# EAGLE board sumorobot (EAGLE 7.1.0)
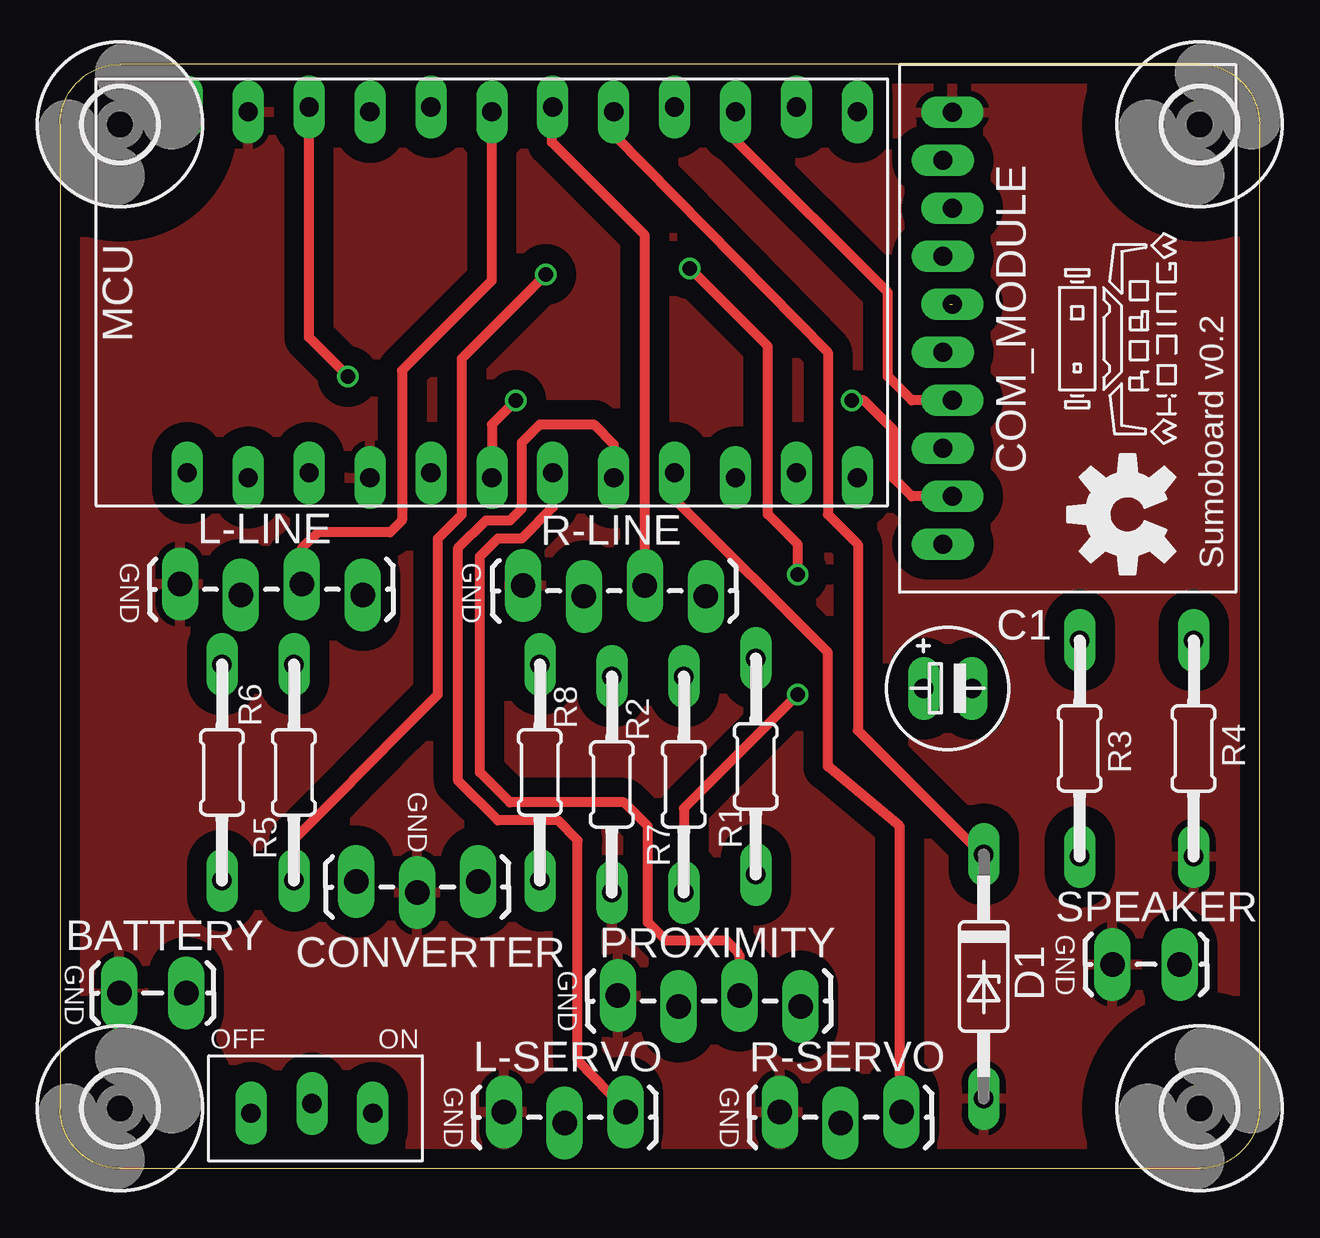
[diagram p0: board, top side]
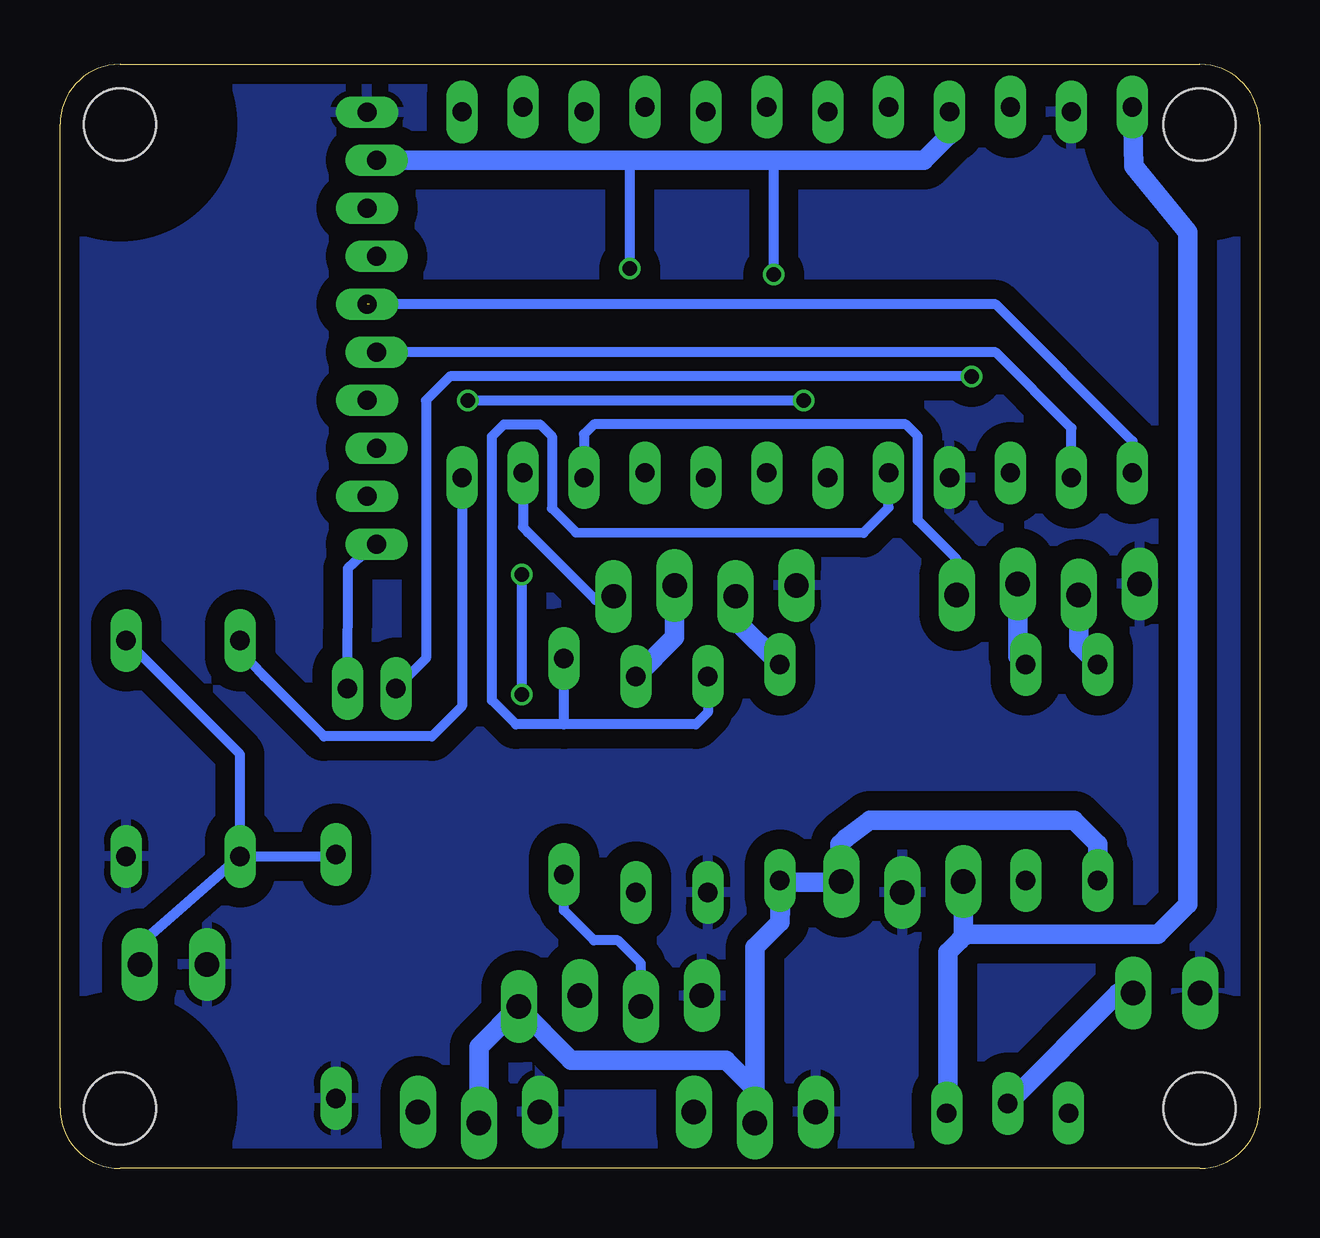
[diagram p1: board, bottom side, seen from below]

Size 50 x 46 mm. Coordinates in mm from the lower left corner, seen from the top.
Outline: 2.5,0 47.5,0 arc90 50,2.5 50,43.5 arc90 47.5,46 2.5,46 arc90 0,43.5 0,2.5 arc90 2.5,0
Copper layers (1*16): Top 0.035mm / dielectric 1.5mm / Bottom 0.035mm
Design rules "SeeedStudio_2layer_DRU_no_angle_20140221": minimum track width 6mil, minimum drill 12mil, track to track 6mil, track to pad 6mil, pad to pad 6mil, via to via 6mil, smd to smd 0mil, copper to edge 10mil, drill to drill 10mil, minimum pad ring 10mil, minimum via ring 6mil, stop-mask expansion 2mil, vias tented up to drill 100mil, thermal gap 10mil

## Footprints (pad centres in the part's own frame; a part is rotated, then mirrored left to right if it is on the bottom)
1X02_LOCK_LONGPADS = drill 1.016 long: 1 -0.127,0; 2 2.667,0
E2-5 = drill 0.813 pad 1.27 long: + -1,0; - 1.016,0
WIFI_MODULE-T = drill 0.8 long: +3V3 -6,-0.2; EXT_RESET -2,-0.2; GND -8,0.2; NRELOAD -4,0.2; PWM_1 10,-0.2; PWM_2 8,0.2; PWM_3 6,-0.2; PWR_SW 4,0.2; RX 0,0.2; TX 2,-0.2
1X03_LOCK_LONGPADS = drill 1.016 long: 1 0,0.1; 2 2.54,-0.354; 3 5.08,0.1
DO35Z10 = drill 0.813 long: A 5.08,0; C -5.08,0
1X04_LOCK_LONGPADS = drill 1.016 long: 1 0,0.1; 2 2.54,-0.354; 3 5.08,0.1; 4 7.62,-0.354
ARDUINO_PRO_MINI = drill 0.8 long: 1 -7.52,12.7; 2 -7.72,10.16; 3 -7.52,7.62; 4 -7.72,5.08; 5 -7.52,2.54; 6 -7.72,0; 7 -7.52,-2.54; 8 -7.72,-5.08; 9 -7.52,-7.62; 10 -7.72,-10.16; 11 -7.52,-12.7; 12 -7.72,-15.24; 13 7.52,-15.24; 14 7.72,-12.7; 15 7.52,-10.16; 16 7.72,-7.62; 17 7.52,-5.08; 18 7.72,-2.54; 19 7.52,0; 20 7.72,2.54; 21 7.52,5.08; 22 7.72,7.62; 23 7.52,10.16; 24 7.72,12.7
SPDT_SLIDE_SWITCH = drill 0.8 long: COMMON 0,0.2; SW1 -2.54,-0.2; SW2 2.54,-0.2
0204/5 = drill 0.813 long: 1 -4.5,0; 2 4.5,0
3,0 = hole 3: 0,0

## Placement (x,y rotation side)
BATTERY  [1X02_LOCK_LONGPADS]  2.6,7.3 0 top
C1  2.2uF  [E2-5]  37,20 0 top
COM_MODULE  [WIFI_MODULE-T]  37,36 270 top
CONVERTER  [1X03_LOCK_LONGPADS]  12.35,11.85 0 top
D1  3V  [DO35Z10]  38.5,8 270 top
L-LINE  [1X04_LOCK_LONGPADS]  5,24.25 0 top
L-SERVO  [1X03_LOCK_LONGPADS]  18.5,2.25 0 top
LOGO1  OSHW-LOGOM  [OSHW-LOGO-M]  44.5,27.25 90 top
LOGO2  ROBOKODING-LOGOM  [ROBOKODING-LOGO-M]  44.25,34.5 90 top
MCU  [ARDUINO_PRO_MINI]  18,36.5 90 top
POWER  SPDT_SLIDE_SWITCH  [SPDT_SLIDE_SWITCH]  10.5,2.5 0 top
PROXIMITY  [1X04_LOCK_LONGPADS]  23.25,7.1 0 top
R1  1K8  [0204/5]  29,16.75 90 top
R2  3K3  [0204/5]  23,16 270 top
R3  100  [0204/5]  42.5,17.5 270 top
R4  1M  [0204/5]  47.25,17.5 270 top
R5  4K7  [0204/5]  9.75,16.5 90 top
R6  220  [0204/5]  6.75,16.5 270 top
R7  4K7  [0204/5]  26,16 90 top
R8  220  [0204/5]  20,16.5 270 top
R-LINE  [1X04_LOCK_LONGPADS]  19.3,24.19 0 top
R-SERVO  [1X03_LOCK_LONGPADS]  30,2.25 0 top
SPEAKER  [1X02_LOCK_LONGPADS]  44,8.5 0 top
U$1  [3,0]  47.5,2.5 0 top
U$2  [3,0]  47.5,43.5 0 top
U$3  [3,0]  2.5,2.5 0 top
U$4  [3,0]  2.5,43.5 0 top

## Library data of the parts
BATTERY CONVERTER L-LINE L-SERVO PROXIMITY R-LINE R-SERVO SPEAKER = SparkFun-Connectors
C1 R1-R8 = Child-Friendly-Parts
COM_MODULE = usr_wifi
D1 = diode
LOGO1 = SparkFun-Aesthetics
LOGO2 = robokoding-logo
MCU = SparkFun-Boards
POWER = custom
U$1-U$4 = holes

## Nets
+3V3: COM_MODULE.+3V3 MCU.21 R5.1 R7.1
+5V: CONVERTER.3 L-SERVO.2 PROXIMITY.4 R6.2 R8.2 R-SERVO.2
A0: D1.C MCU.17 R3.2 R4.1 SPEAKER.2
A1: MCU.18 R7.2 R-LINE.3
A2: L-LINE.3 MCU.19 R5.2
BAT_IN: BATTERY.2 POWER.COMMON
D2: MCU.5 R1.2 R2.1
D3: COM_MODULE.PWM_2 MCU.6
D4: MCU.7 PROXIMITY.3
D5: L-SERVO.3 MCU.8
D6: MCU.9 R-SERVO.3
D7: L-LINE.4 MCU.10
D8: MCU.11 R-LINE.4
D9: MCU.12 R3.1
D12: COM_MODULE.PWR_SW MCU.15
GND: BATTERY.1 COM_MODULE.GND CONVERTER.2 D1.A L-LINE.1 L-SERVO.1 MCU.4 MCU.23 PROXIMITY.1 R2.2 R4.2 R-LINE.1 R-SERVO.1 SPEAKER.1
N$1: PROXIMITY.2 R1.1
N$6: L-LINE.2 R6.1
N$7: R8.1 R-LINE.2
NLINK: C1.- COM_MODULE.PWM_1
RST: C1.+ MCU.22
RXD: COM_MODULE.TX MCU.2
TXD: COM_MODULE.RX MCU.1
VIN: CONVERTER.1 MCU.24 POWER.SW2

## Tracks (layer width: path | path; a pad name or v marks a point on that pad's centre or on a via)
+3V3  (via drill 0.6)
  Top 0.406: v30.75,19.75 26,15 R7.1 | v30.75,24.75 30.75,26 29.5,27.25 29.5,34.25 v26.25,37.5 | v20.25,37.25 16.75,33.75 16.75,27.25 15.75,26.25 15.75,19.75 14.21,18.21 11.5,15.46 9.75,13.71 R5.1
  Bottom 0.406: v30.75,19.75 v30.75,24.75 | v26.25,37.5 26.25,41.75 26,42 | v20.25,37.25 20.25,42
  Bottom 0.813: 36.9,42 COM_MODULE.+3V3 36.6,42 26,42 20.25,42 14,42 13,43 MCU.21
+5V
  Bottom 0.813: R-SERVO.2 32.54,5.08 PROXIMITY.4 30.9,6.73 28.75,4.55 28.7,4.5 22.25,4.5 21.04,3.29 L-SERVO.2 21.04,9.21 20,10.25 | 20,10.25 R8.2 19.93,11.93 17.5,11.93 | 20,10.25 19.93,12 | R6.2 6.75,13.5 7.75,14.5 16.25,14.5 17.25,13.75 17.5,13.5 17.5,11.93 | CONVERTER.3 17.48,11.95 17.5,11.93
A0
  Top 0.406: MCU.17 23.08,43.08 32,34 32,27.25 33.25,26 33.25,18.25 38.5,13 D1.C
  Bottom 0.406: SPEAKER.2 46.67,9.33 R3.2 | R3.2 38.58,13 D1.C | R3.2 42.5,17.25 R4.1
A1
  Top 0.406: R-LINE.3 24.38,38.87 20.5,42.75 20.5,44.18 MCU.18
  Bottom 0.813: R-LINE.3 24.38,22.12 R7.2
A2
  Top 0.406: MCU.19 18,37 14.25,33.25 14.25,27 13.75,26.5 10.75,26.5 10.08,25.83 L-LINE.3
  Bottom 0.813: R5.2 10.08,21.33 L-LINE.3
BAT_IN
  Bottom 0.813: POWER.COMMON 5.9,7.3 BATTERY.2
D2
  Bottom 0.406: R2.1 23,19 23.5,18.5 29,18.5 | 29,18.5 31,18.5 32,19.5 32,30.5 31.5,31 30,31 29.5,30.5 29.5,27.5 28.5,26.5 16.51,26.48 15.5,27.5 15.46,27.54 MCU.5 | 29,18.5 R1.2
D3  (via drill 0.6)
  Top 0.406: COM_MODULE.PWM_2 35.5,28 34.75,28.75 34.75,30.75 33.5,32 v33,32 | v19,32 18,31 MCU.6
  Bottom 0.406: v33,32 v19,32
D4
  Top 0.406: MCU.7 20.54,27.54 19.25,26.25 18.25,26.25 17.5,25.5 17.51,23.22 17.5,16.5 18.75,15.25 23.5,15.25 24.5,14.25 24.5,10.25 25.25,9.5 27.75,9.5 28.25,9 28.33,8.85 PROXIMITY.3
D5
  Top 0.406: MCU.8 23.08,30.17 22.25,31 20,31 19.25,30.25 19.25,27.5 18.75,27 17.75,27 16.6,25.85 16.6,16.15 18.25,14.5 20.75,14.5 21.58,13.67 21.58,4.5 23.5,2.5 23.5,2.43 L-SERVO.3
D6
  Top 0.406: MCU.9 25.62,27.88 32,21.5 32,16.75 35,14.25 35,2.5 35.08,2.5 R-SERVO.3
D7
  Bottom 0.406: L-LINE.4 12.62,25.37 14.25,27 14.25,30.5 14.75,31 27.75,31 28.16,30.59 MCU.10
D8
  Bottom 0.406: MCU.11 30.7,26.72 30.5,26.5 27.69,23.69 26.92,23.69 R-LINE.4
D9
  Bottom 0.406: MCU.12 33.24,19.26 34.5,18 39,18 41.5,20.5 42.5,21.54 R3.1
D12
  Top 0.406: COM_MODULE.PWR_SW 35.5,32 34.5,33 34.5,36.5 28.16,42.84 MCU.15
GND
  pour Top (isolate 0.813): -0.5,46.5 50.5,46.5 50.5,-0.5 -0.5,-0.5
  pour Bottom (isolate 0.813): 0,46 50,46 50,0 0,0
N$1
  Bottom 0.406: PROXIMITY.2 25.79,8.54 26.75,9.5 27.75,9.5 29,10.75 R1.1
N$6
  Bottom 0.813: L-LINE.2 7.54,21.79 R6.1
N$7
  Bottom 0.813: R-LINE.2 21.84,22.84 R8.1
NLINK
  Bottom 0.406: C1.- 38,25 36.9,26 COM_MODULE.PWM_1
RST  (via drill 0.6)
  Top 0.406: v12,33 10.38,34.62 MCU.22
  Bottom 0.406: v12,33 33.75,33 34.75,32 34.75,21.25 C1.+
RXD
  Bottom 0.406: MCU.2 7.84,30.84 11,34 COM_MODULE.TX 36.9,34
TXD  (1 unrouted)
  Bottom 0.406: MCU.1 5.3,30.3 11,36 37.1,36
VIN
  Bottom 0.813: MCU.24 5.25,41.75 3,39 3,11 4.25,9.75 12.25,9.75 12.35,9.65 | POWER.SW2 13,2.34 13,9 12.5,9.5 12.35,9.65 | CONVERTER.1 12.35,9.65

## Text on the board
tPlace: GND | GND | Sumoboard v0.2 | GND | GND | GND | GND | OFF | ON | GND | GND